# Altium PCB 505153_1_1.PcbDoc
Units mil, origin at the board's own origin, x right, y up, seen from the top; angles counter-clockwise.
Board outline 3550 x 2525 mil, 2 copper layers (Top Layer, Bottom Layer); 32 components, 19 nets, 104 pads, 0 vias.
Unrouted connection lines stored in the file: 72.
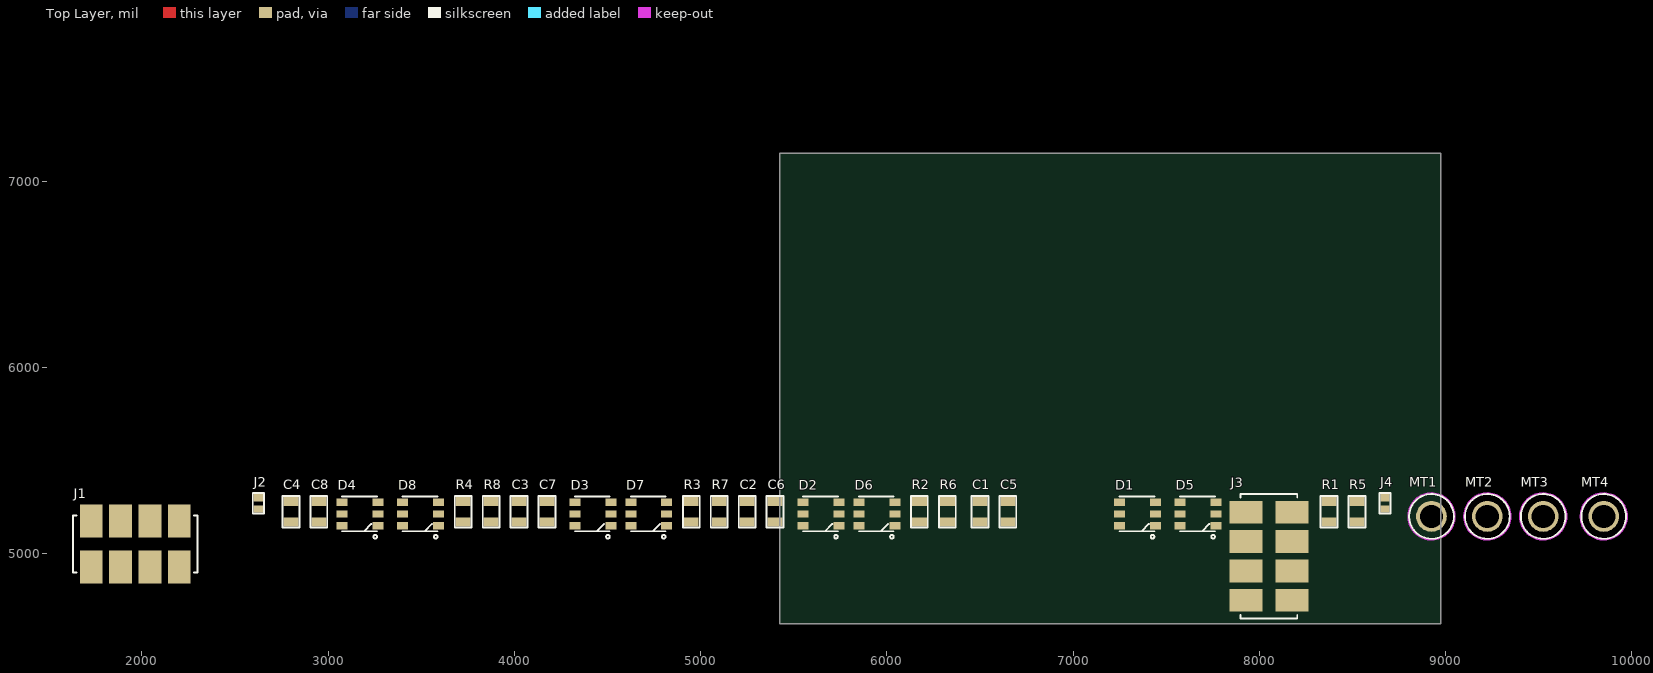
[diagram p0: Top Layer view]
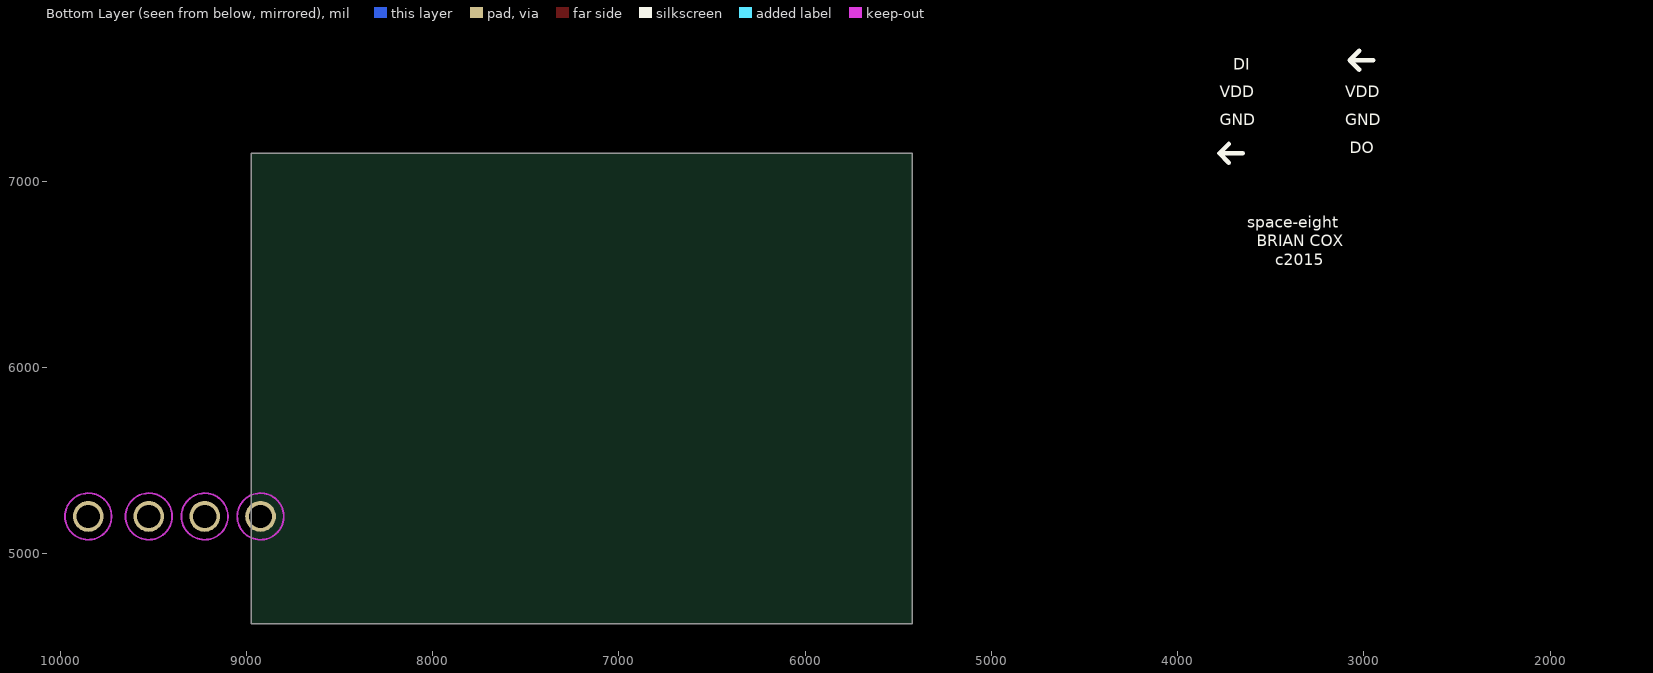
[diagram p1: Bottom Layer view, seen from below]

## Layer stack, top to bottom
Top Layer: signal copper 1.4
Dielectric: core 12.6, FR-4, Dk 4.8
Bottom Layer: signal copper 1.4

## Board outline
5425,4625 8975,4625 8975,7150 5425,7150

## Design rules (kind name [scope] priority, off if disabled: settings)
Clearance LED [(HasFootprint('LED T-1'))] p1: gap=0
Clearance POLYGON [(InPolygon)] p2: gap=35
Clearance JUMPER [(HasFootprint('JUMPER_SMT'))] p3: gap=0
Clearance [All] p4: gap=15
ComponentClearance [All] p1: gap=5 collisioncheckmode=0 verticalgap=10
HoleSize [All] p1: absolutevalues=TRUE maxlimit=126 minlimit=1 maxpercent=80.000 minpercent=20.000
PasteMaskExpansion [All] p1: expansion=-5
PlaneClearance [All] p1: clearance=35
PlaneConnect [All] p1: planeconnectstyle=Relief reliefexpansion=25 reliefentries=4 reliefconductorwidth=25 reliefairgap=25
PolygonConnect [All] p1: connectstyle=Direct reliefconductorwidth=25 reliefentries=4 polygonreliefangle="90 Angle"
RoomDefinition 505153_1_1 [InComponentClass('505153_1_1')] p1: confinementstyle=ConfineIn formatcopy=TRUE lockcomponents=FALSE outline 1600,4100 10900,4100 10900,6300 1600,6300
RoutingVias [All] p1: holewidth=20 width=41 viastyle="Through Hole" minholewidth=20 minwidth=41 maxholewidth=35 maxwidth=65
SMDNeckDown [All] p1 off: percent=75.000
SolderMaskExpansion [All] p1: expansion=4
TestPointUsage [All] p1: valid=0 allowmultiple=FALSE
Testpoint [All] p1: side=15 testpointundercomponent=TRUE minsize=40 maxsize=100 preferedsize=60 minholesize=0 maxholesize=40 preferedholesize=32 testpointgrid=1 style=1023 order=0123456789
Width [All] p1: maxlimit=250 minlimit=5 preferedwidth=25 bottomlayer_prefwidth=50 minimp=50.000000 maximp=50.000000 favimp=50.000000
Width DC [(InNet('DC*'))] p2: maxlimit=100 minlimit=15 preferedwidth=50
Width AC [(InNet('AC1') or InNet('AC2'))] p3: maxlimit=100 minlimit=15 preferedwidth=50
14 further rules are at their usual default settings.

## Components (designator, comment, footprint, x,y, rotation, side; value= is the part's Value field where it differs from the comment)
C1 "CAP_1206" SMT_1206_MOD 6500,5225 r0 top
C2 "CAP_1206" SMT_1206_MOD 5250,5225 r0 top
C3 "CAP_1206" SMT_1206_MOD 4025,5225 r0 top
C4 "CAP_1206" SMT_1206_MOD 2800,5225 r0 top
C5 "CAP_1206" SMT_1206_MOD 6650,5225 r0 top
C6 "CAP_1206" SMT_1206_MOD 5400,5225 r0 top
C7 "CAP_1206" SMT_1206_MOD 4175,5225 r0 top
C8 "CAP_1206" SMT_1206_MOD 2950,5225 r0 top
D1 "LED_NEOPIXEL" NEOPIXEL 7250,5150 r0 top
D2 "LED_NEOPIXEL" NEOPIXEL 5550,5150 r0 top
D3 "LED_NEOPIXEL" NEOPIXEL 4325,5150 r0 top
D4 "LED_NEOPIXEL" NEOPIXEL 3075,5150 r0 top
D5 "LED_NEOPIXEL" NEOPIXEL 7575,5150 r0 top
D6 "LED_NEOPIXEL" NEOPIXEL 5850,5150 r0 top
D7 "LED_NEOPIXEL" NEOPIXEL 4625,5150 r0 top
D8 "LED_NEOPIXEL" NEOPIXEL 3400,5150 r0 top
J1 "IDC CONN, 4-pin" IDC_CONN_SMT_4-PIN 2200,5175 r180 top
J2 "JUMPER_MOD" JUMPER_SMT 2625,5300 r0 top
J3 "IDC CONN, 4-pin" IDC_CONN_SMT_4-PIN 8175,4750 r90 top
J4 "JUMPER_MOD" JUMPER_SMT 8675,5300 r0 top
MT1 "MOUNTING HOLE" "MOUNTING HOLE" 8925,5200 r0 top
MT2 "MOUNTING HOLE" "MOUNTING HOLE" 9225,5200 r0 top
MT3 "MOUNTING HOLE" "MOUNTING HOLE" 9525,5200 r0 top
MT4 "MOUNTING HOLE" "MOUNTING HOLE" 9850,5200 r0 top
R1 "RES_1206" SMT_1206_MOD 8375,5225 r0 top
R2 "RES_1206" SMT_1206_MOD 6175,5225 r0 top
R3 "RES_1206" SMT_1206_MOD 4950,5225 r0 top
R4 "RES_1206" SMT_1206_MOD 3725,5225 r0 top
R5 "RES_1206" SMT_1206_MOD 8525,5225 r0 top
R6 "RES_1206" SMT_1206_MOD 6325,5225 r0 top
R7 "RES_1206" SMT_1206_MOD 5100,5225 r0 top
R8 "RES_1206" SMT_1206_MOD 3875,5225 r0 top

## Footprints (in the part's own frame and the unit in brackets; to place one, negate y for a bottom-side part, rotate by r counter-clockwise, add the part's x,y. Pads: shape width x height; smd on the part's side, far side on the other; paste and mask are expansions set on the pad)
IDC_CONN_SMT_4-PIN [mm] "FOR NEOPIXEL BOARDS"
  rect 3.1x4.5 smd: 1(0,6.25) 1(0,0) 2(4,6.25) 2(4,0) 3(8,6.25) 3(8,0) 4(12,6.25) 4(12,0)
  silkscreen extent -2.5,-0.75 14.5,7
JUMPER_SMT [mil]
  rect 50x40 smd: 1(0,0) 2(0,-60)
  silkscreen extent -30,-85 30,25
"MOUNTING HOLE" [mil] "Mounting Hole"
  round 165 hole 125: 1(0,0)
  Keep-Out Layer circle w10: c0,0 r125
  silkscreen extent -120,-120 120,120
NEOPIXEL [mm] "Adafruit Neopixel"
  rect 1.5x1 smd: 1(4.897,0) 2(4.897,1.6) 3(4.897,3.2) 4(0,3.2) 5(0,1.6) 6(0,0)
  silkscreen extent 0,-1.75 4.75,4
SMT_1206_MOD [mil]
  rect 80x50 smd: 1(0,55) 2(0,-55)
  silkscreen extent -45,-85 45,85

## Part data
C1 C2 C3 C4 C5 C6 C7 C8: "CAP"
D1 D2 D3 D4 D5 D6 D7 D8: "RGB NEOPIXEL"
J1 J3: "ICD Connector, 4-Pin"
R1 R2 R3 R4 R5 R6 R7 R8: "RES"

## Nets (pads, with @x,y where several pads share a name; then routed paths per layer and width w, separated by ;. In a path a pad name is that pad's centre, name@x,y a point inside that pad or via, vN(x,y) a via of type N, cw(c..) or ccw(c..) an arc to the next point about the centre after c; other vN are vias at no path point)
DI: D1.2 J1.1 J3.1 J4.1
DO: D8.1 J1.4 J2.2 J3.4
GND: C1.1 C2.1 C3.1 C4.1 C5.1 C6.1 C7.1 C8.1 D1.6 D2.6 D3.6 D4.6 D6.6 D7.6 D8.6 J1.3 J3.3
NetC1_2: C1.2 D1.3 R1.2
NetC2_2: C2.2 D2.3 R2.2
NetC3_2: C3.2 D3.3 R3.2
NetC4_2: C4.2 D4.3 R4.2
NetC5_2: C5.2 D5.3 R5.2
NetC6_2: C6.2 D6.3 R6.2
NetC7_2: C7.2 D7.3 R7.2
NetC8_2: C8.2 D8.3 R8.2
NetD1_1: D1.1 D2.2
NetD2_1: D2.1 D3.2
NetD3_1: D3.1 D4.2
NetD4_1: D4.1 D5.2 J2.1 J4.2
NetD5_1: D5.1 D6.2
NetD6_1: D6.1 D7.2
NetD7_1: D7.1 D8.2
VDD: D1.5 D2.5 D3.5 D4.5 D5.5 D6.5 D7.5 D8.5 J1.2 J3.2 R1.1 R2.1 R3.1 R4.1 R5.1 R6.1 R7.1 R8.1
pads on no net: D1.4 D2.4 D3.4 D4.4 D5.4 D5.6 D6.4 D7.4 D8.4 MT1.1 MT2.1 MT3.1 MT4.1

## Silkscreen, mask and mechanical layers (free items; w line width, h text height)
Bottom Overlay:
  lines w25: 2950,7650 3075,7650 ; 3025,7600 3075,7650 ; 3025,7700 3075,7650 ; 3650,7150 3775,7150 ; 3725,7100 3775,7150 ; 3725,7200 3775,7150
  text "505150v101" at 3875,8175 h60
  text "CIRCLE RGB" at 3875,8050 h60
  text "DI" at 3700,7600 h60
  text "VDD" at 3100,7450 h60
  text "VDD" at 3775,7450 h60
  text "GND" at 3100,7300 h60
  text "GND" at 3775,7300 h60
  text "DO" at 3075,7150 h60
  text "space-eight" at 3625,6750 h60
  text "BRIAN COX" at 3575,6650 h60
  text "c2015" at 3475,6550 h60
Mechanical 3:
  drawing of 367 lines, arcs and shapes, not listed
Mechanical 4:
  text ".Pcb_File_Name" at 1200,3525 h100
  text ".Print_Date" at 1200,3275 h100
Mechanical 9:
  text "-SB" at 2000,8775 h150
  text "3. All marking on PCB must be white silk screen." at 1200,1775 h100
  text "BOTTOM SILKSCREEN" at 9550,1350 h80
  text "-SB" at 11200,1050 h100
Mechanical 10:
  text "-T" at 2000,8775 h150
  text "3. PCB is double sided." at 1200,1775 h100
  text "4. Holes are plated through." at 1200,1625 h100
  text "5. All bare copper on PCB must be tin plated." at 1210,1475 h100
  text "TOP COPPER" at 9575,1350 h80
  text "-T" at 11200,1050 h100
Mechanical 11:
  text "-B" at 2000,8775 h150
  text "3. PCB is double sided." at 1200,1775 h100
  text "4. Holes are plated through." at 1200,1625 h100
  text "5. All bare copper on PCB must be tin plated." at 1210,1475 h100
  text "BOTTOM COPPER" at 9600,1350 h80
  text "-B" at 11200,1050 h100
Mechanical 12:
  text "-MT" at 2000,8775 h150
  text "3. Top side of PCB must be covered with green solder mask." at 1200,1775 h100
  text "TOP SOLDERMASK" at 9550,1350 h80
  text "-MT" at 11200,1050 h100
Mechanical 13:
  text "-MB" at 2000,8775 h150
  text "3. Bottom side of PCB must be covered with green solder mask." at 1200,1775 h100
  text "BOTTOM SOLDERMASK" at 9550,1350 h80
  text "-MB" at 11200,1050 h100
Mechanical 14:
  text "-ST" at 2000,8775 h150
  text "3. All marking on PCB must be white silk screen." at 1200,1775 h100
  text "TOP SILKSCREEN" at 9550,1350 h80
  text "-ST" at 11200,1050 h100
Mechanical 15:
  text "-D" at 2000,8775 h150
  text "MECHANICAL" at 9550,1350 h80
  text "-D" at 11200,1050 h100
Mechanical 16:
  lines w5: 2500,8700 2500,9000
  lines w10: 7887.71,1275 11500,1275 ; 7887.71,1550 11500,1550 ; 7887.71,1825 11500,1825 ; 7887.71,2100 11487.71,2100 ; 7887.71,8250 11500,8250 ; 7887.71,8400 11500,8400 ; 7887.71,8550 11500,8550 ; 7887.71,8700 11500,8700 ; 7887.71,8850 11500,8850 ; 8137.71,8250 8137.71,9000 ; 8512.71,8250 8512.71,9000 ; 8762.71,8250 8762.71,9000 ; 8787.71,1000 8787.71,1275 ; 8787.71,1550 8787.71,2100 ; 9687.71,1550 9687.71,2100 ; 10587.71,1000 10587.71,1275 ; 10587.71,1825 10587.71,2100 ; 1000,1000 1000,1025 1000,9000 11500,9000 11500,1000 1000,1000
  lines w16: 1000,8700 6292.09,8700 6292.09,9000 ; 2500,8700 2500,9000 ; 7887.71,1000 7887.71,2525 11487.71,2525 ; 7887.71,2100 11500,2100 ; 7887.71,8250 7887.71,9000
  text "REV." at 7925,8900 h50
  text "DATE" at 8233.55,8900 h50
  text "BY" at 8596.05,8900 h50
  text "DESCRIPTION" at 9818.86,8900 h50
  text "PROPRIETARY INFORMATION. DO NOT REPRODUCE, COPY," at 2575,8890 h50
  text "505XXX" at 1125,8775 h150
  text "OR USE WITHOUT EXPRESS WRITTEN PERMISSION." at 2575,8775 h50
  text "PRELIMINARY" at 9750,8750 h60
  text "1" at 7992.71,8745 h60
  text "XXXXXX" at 8155,8745 h60
  text "BC" at 8577.71,8745 h60
  text "-" at 8300,8600 h60
  text "-" at 7992.71,8595 h60
  text "-" at 8617.71,8595 h60
  text "-" at 10111.36,8595 h60
  text "-" at 7992.71,8445 h60
  text "-" at 8300,8445 h60
  text "-" at 8617.71,8445 h60
  text "-" at 10111.36,8445 h60
  text "-" at 7992.71,8295 h60
  text "-" at 8300,8295 h60
  text "-" at 8617.71,8295 h60
  text "-" at 10111.36,8295 h60
  text "space-eight.com" at 8900,2325 h100
  text "REMARKS:" at 1200,2225 h100
  text "343 NW 84TH ST, SEATTLE, WA 98117, PH: 323 791-6991" at 8375,2175 h50
  text "1. Dimensions are in inches." at 1200,2075 h100
  text "DATE:" at 7912.71,2025 h50
  text "DRAWN BY:" at 8812.71,2025 h50
  text "CHECKED BY:" at 9712.71,2025 h50
  text "APPROVED BY:" at 10612.71,2025 h50
  text "2. Board size is X in x X in." at 1200,1925 h100
  text "XXXXXX" at 8100,1885 h80
  text "BC" at 9200,1885 h80
  text "BC" at 10100,1885 h80
  text "LAST REV. DATE:" at 7912.71,1750 h50
  text "REV. LEVEL:" at 8812.71,1750 h50
  text "MATERIAL:" at 9712.71,1750 h50
  text "FR4, NATURAL" at 10200,1725 h50
  text "-" at 8200,1600 h80
  text "1" at 9200,1600 h80
  text "THICKNESS:" at 9712.71,1600 h50
  text ".062in, 1oz. Cu" at 10200,1600 h50
  text "TITLE:" at 7912.71,1475 h50
  text "PCB FOR SP11XXXX" at 8200,1350 h80
  text "SCALE:" at 7912.71,1200 h50
  text "TOL:" at 8812.71,1200 h50
  text ".XX(.X)" at 9200.21,1200 h50
  text ".XXX(.XX)" at 9775.21,1200 h50
  text "ANGLE:" at 10275,1200 h50
  text "DRAWING NUMBER:" at 10625,1200 h50
  text "1:1" at 8311.05,1060 h80
  text ".010(.25)" at 9000,1060 h80
  text ".005(.13)" at 9700,1060 h80
  text "-" at 10423.55,1060 h80
  text "505XXX" at 10625,1050 h100
Drill Drawing:
  text ".Legend" at 1250,2925 h100
  text "Drill Legend" at 1225,2600 h100